# Altium PCB CropPred.PcbDoc
Units mil, origin at the board's own origin, x right, y up, seen from the top; angles counter-clockwise.
Board outline 1940 x 1070 mil, 2 copper layers (Top Layer, Bottom Layer); 12 components, 11 nets, 40 pads, 0 vias.
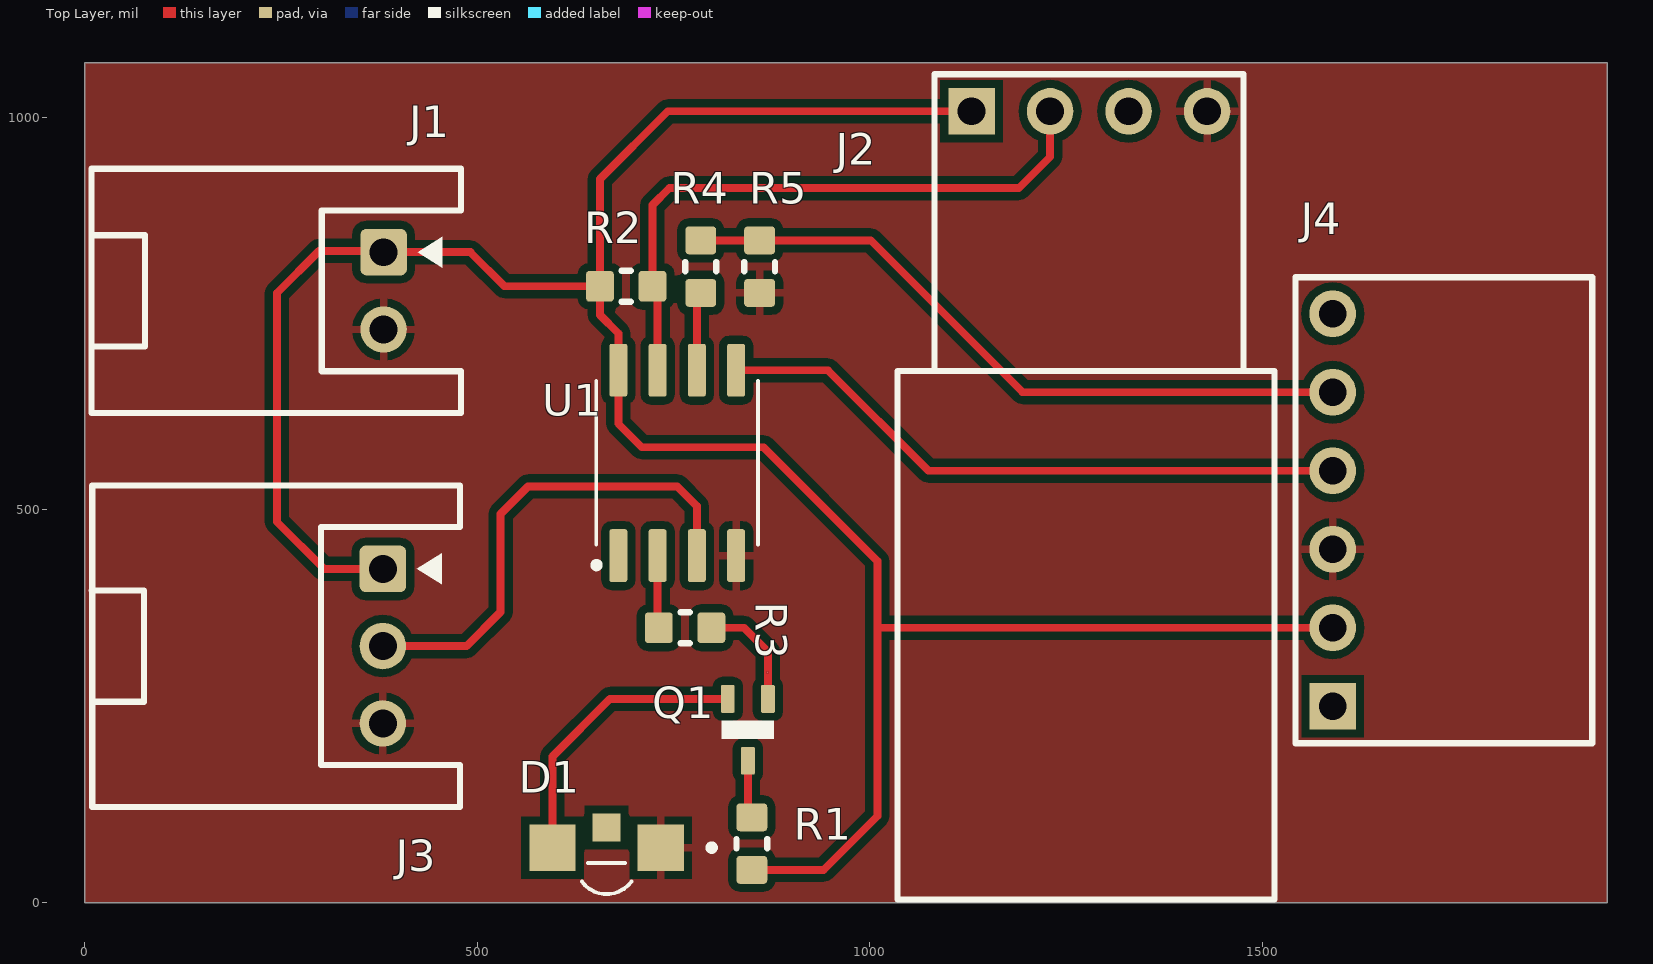
[diagram p0: Top Layer view]
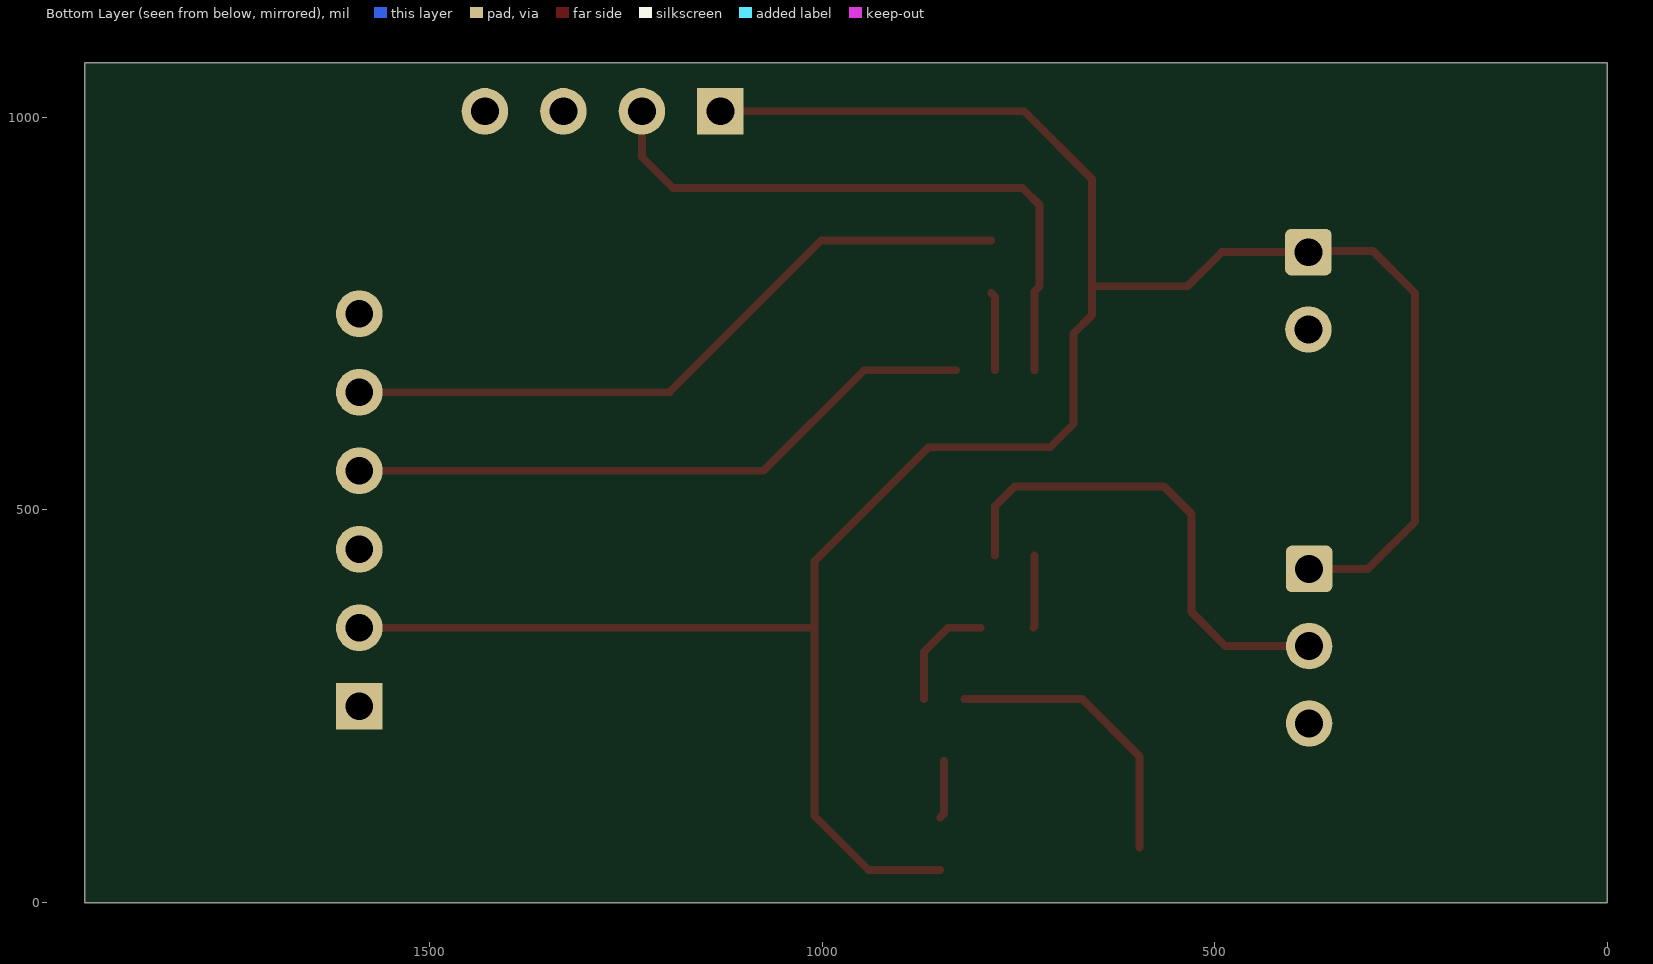
[diagram p1: Bottom Layer view, seen from below]

## Layer stack, top to bottom
Top Solder: solder mask 0.4, Solder Resist, Dk 3.5
Top Layer: signal copper 1.4
Dielectric 1: dielectric 12.6, FR-4, Dk 4.8
Bottom Layer: signal copper 1.4
Bottom Solder: solder mask 0.4, Solder Resist, Dk 3.5

## Board outline
0,0 1940,0 1940,1070 0,1070

## Design rules (kind name [scope] priority, off if disabled: settings)
Clearance [All] p1: gap=10 ignorepadtopadclearanceinfootprint=FALSE except(0: Arc-Hole Track-Hole SMDPad-Hole THPad-Hole Via-Hole Fill-Hole Poly-Hole Region-Hole Text-Hole)
PolygonConnect [All] p1: connectstyle=Relief reliefconductorwidth=10 reliefentries=4 polygonreliefangle="90 Angle" airgapwidth=10
RoutingVias [All] p1: holewidth=28 width=50 viastyle="Through Hole" minholewidth=28 minwidth=50 maxholewidth=28 maxwidth=50
SolderMaskExpansion [All] p1: expansion=4 istentingtop=FALSE
Width [All] p1: maxlimit=10 minlimit=10 preferedwidth=10
30 further rules are at their usual default settings.

## Components (designator, comment, footprint, x,y, rotation, side; value= is the part's Value field where it differs from the comment)
D1 "LED" LED_APA3010QBC/G-GX 665,69.88 r180 top
J1 "Battery" CON_HDR1x2_2p50_RA_SHRD_JST_S2B-HX-A 381,730 r90 top
J2 "DHT11" 4posF 1130,1007.87 r0 top
J3 "pH" CON_HDR1x3_2p50_RA_SHRD_JST-S3B-XH-A 380,228.15 r90 top
J4 "HC05" 6posf 1590,250 r90 top
Q1 "NPN" SOT323 845,220 r270 top
R1 "5K" 0603-R_N 850,75 r270 top
R2 "5K" 0603-R_N 690,785 r180 top
R3 "5K" 0603-R_N 765,350 r0 top
R4 "1K" 0603-R_N 785,810 r270 top
R5 "2K" 0603-R_N 860,810 r90 top
U1 "ATTINY85-20SU" SOIC127P798X216-8N 755,560 r90 top

## Footprints (in the part's own frame and the unit in brackets; to place one, negate y for a bottom-side part, rotate by r counter-clockwise, add the part's x,y. Pads: shape width x height; smd on the part's side, far side on the other; paste and mask are expansions set on the pad)
4posF [mm]
  rect 1.508x1.508 hole 0.9: 1(0,0)
  round 1.508 hole 0.9: 2(2.54,0) 3(5.08,0) 4(7.62,0)
  silkscreen extent -2.4,-25.5 9.8,1.2, body extent -2.3,-25.55 9.7,0.3, height 5.5
6posf [mm]
  rect 1.508x1.508 hole 0.9: 1(0,0)
  round 1.508 hole 0.9: 2(2.54,0) 3(5.08,0) 4(7.62,0) 5(10.16,0) 6(12.7,0)
  silkscreen extent -1.2,-8.4 13.88,1.2, body extent -1.6,-47.8 14.5,0.3, height 3.27
0603-R_N [mm] "Resistor 0603 Medium Density"
  rrect25% 0.9x1 smd: 1(-0.85,0) 2(0.85,0)
  silkscreen extent -0.15,-0.5 0.15,0.5, body extent -0.8,-0.4 0.8,0.4, height 0.3
CON_HDR1x2_2p50_RA_SHRD_JST_S2B-HX-A [mm] "Connector 2-Way 2.50mm Pitch Right Angle Shrouded JST S2B-XH-A"
  rrect25% 1.5x1.5 / inner round 1.5 / far side rrect25% 1.5x1.5 hole 0.9: 1(2.5,0)
  round 1.5 hole 0.9: 2(0,0)
  silkscreen extent -2.7,-2.5 5.2,9.45, body extent -2.45,-2.3 4.95,9.2, height 5.95
CON_HDR1x3_2p50_RA_SHRD_JST-S3B-XH-A [mm] "Connector 3-Way 2.50mm Pitch Right Angle Shrouded JST S3B-XH-A"
  rrect25% 1.5x1.5 / inner round 1.5 / far side rrect25% 1.5x1.5 hole 0.9: 1(5,0)
  round 1.5 hole 0.9: 2(2.5,0) 3(0,0)
  silkscreen extent -2.7,-2.5 7.7,9.42, body extent -2.45,-2.3 7.45,9.2, height 6.15
LED_APA3010QBC/G-GX [mm]
  rect 1.5x1.5 smd: 1(-1.75,0) 2(1.75,0)
  rect 0.9x0.9 smd: 3(0,-0.65)
  silkscreen extent -3.5,-0.1 0.8,1.5, body extent -1.5,-0.5 1.5,1.5, height 1
SOIC127P798X216-8N [mm]
  rrect25% 1.71x0.58 smd: 1(-3,1.905) 2(-3,0.635) 3(-3,-0.635) 4(-3,-1.905) 5(3,-1.905) 6(3,-0.635) 7(3,0.635) 8(3,1.905)
  silkscreen extent -3.41,-2.62 2.65,2.71, body extent -3,-2.45 3,2.45, height 1.75
SOT323 [mm] "Small outline 2.1mm L x 1.25mm W x 1.1mm H; 3 lead SC70, EIAJ SC-70, SOT323"
  round 0.5 on Mech2: 0(0,0)
  rrect20% 0.9x0.45 smd: 1(-1,0.65) 2(-1,-0.65) 3(1,0)
  silkscreen extent -0.3,-0.85 0.3,0.85, body extent -1.2,-1.1 1.2,1.1, height 1.1

## Part data
D1: library part APA3010QBC/G-GX, "Surface Mount LED; Size : 3.0X1.0mm ; Color: Blue; Lens: Water Clear", Package=None, Availability=Unavailable, MP=APA3010QBC/G-GX, Price=None
J1: library part CON_HDR1x2_2p50_RA_SHRD_JST_S2B-XH-A, "Conn Shrouded Header HDR 2 POS 2.5mm Solder RA Thru-Hole Box", Color=Natural, Contact Resistance=20mR, Current Rating=3A, Housing Color=White, Insulation Resistance=1GR, Manufacturer=JST, Manufacturer Part Number=S2B-XH-A(LF)(SN), Max Operating Temperature=85°C, Max Voltage Rating (AC)=250V, Min Operating Temperature=-25°C, Package Quantity=1000, Supplier Part Number 1=455-2257-ND, Category="Headers and Wire Housings", ComponentLink1Description=Datasheet, ComponentLink1URL=http://www.jst-mfg.com/product/pdf/eng/eXH.pdf, Connector Type="Male Pin", Contact Material=Brass, Contact Plating=Tin,Copper,Lead, Depth=11.5mm, Gender=Male, Housing Material=Polyamide, Lead Free="Lead Free", Lead Pitch=2.5mm, Length=7.4mm, Max Current Rating=3A, Max Voltage Rating (DC)=250V, Mount="Through Hole", Number of Contacts=2, Number of Positions=2, Number of Rows=1, Orientation="Right Angle", Packaging=Bulk, Pitch=2.5mm, Pricing 1="1=0.17000, 10=0.16200, 100=0.11260, 500=0.09524, 1000=0.07792, 5000=0.06927, 10000=0.06277 (USD)", REACH SVHC="No SVHC", RoHS=Yes, Stock 1=55640, Supplier 1=Digi-Key, Termination=Press-Fit, Voltage Rating=250V, Voltage Rating (AC)=250V, Wire/Cable Gauge=22AWG
J3: library part CON_HDR1x3_2p50_RA_SHRD_JST_S3B-XH-A, "Conn Shrouded Header (4 Sides) HDR 3 POS 2.5mm Solder RA Side Entry Thru-Hole Box", Color=Natural, Contact Resistance=20mR, Current Rating=3A, Housing Color=White, Insulation Resistance=1GR, Manufacturer=JST, Manufacturer Part Number=S3B-XH-A(LF)(SN), Max Operating Temperature=85°C, Max Voltage Rating (AC)=250V, Min Operating Temperature=-25°C, Package Quantity=1000, Supplier Part Number 1=455-2250-ND, Category="Headers and Wire Housings", ComponentLink4Description=Datasheet, ComponentLink4URL=http://www.jst-mfg.com/product/pdf/eng/eXH.pdf, Connector Type="Male Pin", Contact Material=Brass, Contact Plating=Tin,Lead,Copper, Depth=11.5mm, Gender=Male, Housing Material=Polyamide, Lead Free="Lead Free", Lead Pitch=2.5mm, Length=9.9mm, Max Current Rating=3A, Mount="Through Hole", Number of Contacts=3, Number of Positions=3, Number of Rows=1, Orientation="Right Angle", Packaging=Bulk, Pitch=2.5mm, Pricing 1="1=0.22000, 10=0.20400, 100=0.14140, 500=0.11968, 1000=0.09792, 5000=0.08704, 10000=0.07888 (USD)", REACH SVHC="No SVHC", RoHS=Yes, Stock 1=12903, Supplier 1=Digi-Key, Termination=Press-Fit, Voltage Rating=250V, Voltage Rating (AC)=250V, Wire/Cable Gauge=22AWG
Q1: library part "Q_NPN 40V 0.2A SOT323", "Bipolar (BJT) Transistor NPN 40V 200mA 300MHz 200mW Surface Mount SOT-323", Case/Package=SOT23-3, Collector Base Voltage (VCBO)=50V, Collector Emitter Breakdown Voltage=45V, Collector Emitter Saturation Voltage=700mV, Collector-emitter Voltage-Max=300mV, Current Rating=200mA, Emitter Base Voltage (VEBO)=5V, Frequency=100MHz, Manufacturer="ON Semiconductor", Manufacturer Part Number=BC817-40LT3G, Max Collector Current=500mA, Max Operating Temperature=150°C, Max Power Dissipation=300mW, Min Operating Temperature=-55°C, Package Quantity=1, Supplier Part Number 1=BC817-40LT3GOSTR-ND, Voltage Rating (DC)=40V, Category=Transistors, Collector Emitter Voltage (VCEO)=45V, ComponentLink1Description=Datasheet, ComponentLink1URL=http://www.onsemi.com/pub/Collateral/BC817-16LT1-D.PDF, ComponentLink2Description=https://datasheet.ciiva.com/23661/1712528-23661528.pdf?src-supplier=Newark, ComponentLink2URL=https://datasheet.ciiva.com/23661/1712528-23661528.pdf?src-supplier=Newark, ComponentLink3Description=https://datasheet.ciiva.com/7643/1699592-7643036.pdf?src-supplier=Element14, ComponentLink3URL=https://datasheet.ciiva.com/7643/1699592-7643036.pdf?src-supplier=Element14, ComponentLink4Description=https://datasheet.ciiva.com/973/mmst3904sot-323-973107.pdf?src-supplier=Digi-Key, ComponentLink4URL=https://datasheet.ciiva.com/973/mmst3904sot-323-973107.pdf?src-supplier=Digi-Key, ComponentLink5Description=https://datasheet.ciiva.com/16290/mmst3904sot-323-20678-16290040.pdf?src-supplier=Mouser, ComponentLink5URL=https://datasheet.ciiva.com/16290/mmst3904sot-323-20678-16290040.pdf?src-supplier=Mouser, ComponentLink6Description=https://datasheet.ciiva.com/973/mmst3904sot-323-973108.pdf?src-supplier=Digi-Key, ComponentLink6URL=https://datasheet.ciiva.com/973/mmst3904sot-323-973108.pdf?src-supplier=Digi-Key, ComponentLink7Description=https://datasheet.ciiva.com/6362/mmst3904sot-323-6362170.pdf?src-supplier=Digi-Key, ComponentLink7URL=https://datasheet.ciiva.com/6362/mmst3904sot-323-6362170.pdf?src-supplier=Digi-Key, ComponentLink8Description=https://datasheet.ciiva.com/17380/mmst3904sot-323-17380250.pdf?src-supplier=Future+Electronics, ComponentLink8URL=https://datasheet.ciiva.com/17380/mmst3904sot-323-17380250.pdf?src-supplier=Future+Electronics, Element Configuration=Single, Gain Bandwidth Product=100MHz, Halogen Free="Halogen Free", hFE Min=250, Lead Free="Lead Free", Max Breakdown Voltage=45V, Max Frequency=100MHz, Mount="Surface Mount", Mounting Type="Surface Mount", Number of Elements=1, Number of Pins=3, Packaging="Tape and Reel", Polarity=NPN, Power Dissipation=300mW, Pricing 1="10000=0.02394, 30000=0.02155, 50000=0.01915, 100000=0.01796, 250000=0.01596 (USD)", Pricing 2="1 = 0.28000, 10 = 0.19100, 25 = 0.19080, 100 = 0.09330, 500 = 0.07780, 1000 = 0.05406 (USD)", Radiation Hardening=No, REACH SVHC="No SVHC", RoHS Compliant=Yes, Series=-, Size Height=0.94mm, Size Length=2.90mm, Size Width=1.30mm, Stock 1=20000, Stock 2=1, Supplier 1=Digi-Key, Supplier 2=Digi-Key, Supplier Part Number 2=MMST3904TPMSCT-ND, Temperature Operating Max=150°C, Temperature Operating Min=-55°C, Transition Frequency=100MHz, Type=NPN
R1 R2 R3 R4 R5: library part R_0R_1/10W_1%_0603, "YAGEO - RC0603FR-070RL - RES, THICK FILM, 0R, 1%, 0.1W, 0603", Case Code (Imperial)=0603, Case Code (Metric)=1608, Current Rating=1A, Manufacturer=Yageo, Manufacturer Part Number=RC0603FR-070RL, Max Operating Temperature=155°C, Max Power Dissipation=100mW, Min Operating Temperature=-55°C, Package Quantity=5000, Resistance=0mR, Resistor Type="Thick Film", Supplier Part Number 1=311-0.0HRCT-ND, Temperature Coefficient=200ppm/°C, Tolerance=1%, Voltage Rating=50V, Working Voltage=75V, Case/Package=0603, Category="Chip SMD Resistors", ComponentLink1Description=Datasheet, ComponentLink1URL=https://datasheet.ciiva.com/11809/0900766b80fcdb72-11809199.pdf?src-supplier=RSComponents, Contact Plating=Tin,Matte, Depth=0.8mm, Features="Moisture Resistant", Height=0.45mm, Lead Free="Lead Free", Length=1.6mm, Military Standard=Not, Number of Pins=2, Number of Terminations=2, Packaging="Tape and Reel", Power Rating=100mW, Pricing 1="1=0.10000, 10=0.01800, 25=0.01320, 50=0.01000, 100=0.00730, 250=0.00560, 500=0.00446, 1000=0.00329 (USD)", Radiation Hardening=No, REACH SVHC="No SVHC", RoHS=Yes, Stock 1=1237372, Supplier 1=Digi-Key, Termination=SMD/SMT, Voltage Rating (DC)=50V, Width=0.031inch
U1: "AVR AVRÂ® ATtiny, IC de microcontrolador de seguridad funcional (FuSa) de 8 bits, 20 MHz, 8 KB (4K x 16), FLASH 8-SOIC", Package="SOIC-8 Microchip", Availability="In Stock", Check_prices=https://www.snapeda.com/parts/ATTINY85-20SU/Microchip/view-part/681099/?ref=eda, MF=Microchip, MP=ATTINY85-20SU, Price=None, SnapEDA_Link=https://www.snapeda.com/parts/ATTINY85-20SU/Microchip/view-part/681099/?ref=snap

## Nets (pads, with @x,y where several pads share a name; then routed paths per layer and width w, separated by ;. In a path a pad name is that pad's centre, name@x,y a point inside that pad or via, vN(x,y) a via of type N, cw(c..) or ccw(c..) an arc to the next point about the centre after c; other vN are vias at no path point)
+5: J1.1 J2.1 J3.1 J4.2 R1.2 R2.2 U1.8 | length 3229.9
  Top Layer w10: J3.1 305,425 245,485 245,776.25 298.75,830 379.43,830 J1.1 381.07,828.49 491.51,828.49 535,785 R2.2 ; R1.2 941.54,41.54 1010,110 1010,350 ; J2.1 742.87,1007.87 656.54,921.54 R2.2 ; J4.2 1010,350 ; R2.2 656.54,748.46 680,725 U1.8 680,610 710,580 865,580 1010,435 1010,350
GND: D1.1 J1.2 J2.4 J3.3 J4.3 R5.1 U1.4
NetD1_2: D1.2 Q1.2 | length 369.9
  Top Layer w10: D1.2 596.1,186.1 669.37,259.37 Q1.2
NetJ2_2: J2.2 R2.1 U1.7 | length 803
  Top Layer w10: U1.7 730,778.46 R2.1 723.46,888.46 745,910 1190,910 1230,950 J2.2
NetJ3_2: J3.2 U1.3 | length 631
  Top Layer w10: J3.2 486.57,326.57 530,370 530,495 565,530 755,530 780,505 U1.3
NetJ4_4: J4.4 U1.5 | length 813.1
  Top Layer w10: U1.5 946.89,678.11 1075,550 J4.4
NetJ4_5: J4.5 R4.1 R5.2 | length 885.1
  Top Layer w10: R4.1 R5.2 1001.54,843.46 1195,650 J4.5
NetQ1_1: Q1.1 R3.2 | length 144.8
  Top Layer w10: R3.2 840,350 870.59,319.41 Q1.1
NetQ1_3: Q1.3 R1.1 | length 74.2
  Top Layer w10: Q1.3 845,113.46 R1.1
NetR3_1: R3.1 U1.2 | length 92.5
  Top Layer w10: U1.2 730,351.54 R3.1
NetR4_2: R4.2 U1.6 | length 100.5
  Top Layer w10: U1.6 780,771.54 R4.2
pads on no net: D1.3 J2.3 J4.1 J4.6 Q1.0 U1.1

## Polygon pours and split planes (outlines as drawn)
GND on Top Layer "GND" (solid, remove dead copper, pour order 0): 0,0 1940,0 1940,1070 0,1070

## Silkscreen, mask and mechanical layers (free items; w line width, h text height)
Board:
  the board outline again, w7.87